# Altium PCB Portable iron V3.0 copy_2020-11-07_00-05-57.pcbdoc
Units mm, origin at the board's own origin, x right, y up, seen from the top; angles counter-clockwise.
Board outline 158.21 x 82.37 mm, 2 copper layers (Top Layer, Bottom Layer); 40 components, 54 nets, 120 pads, 41 vias.
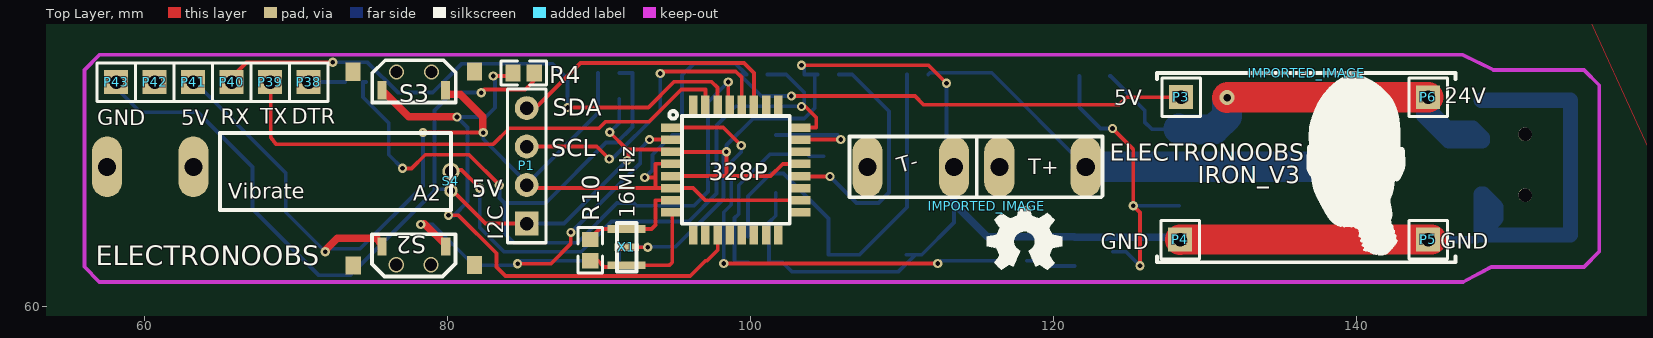
[diagram p0: Top Layer view]
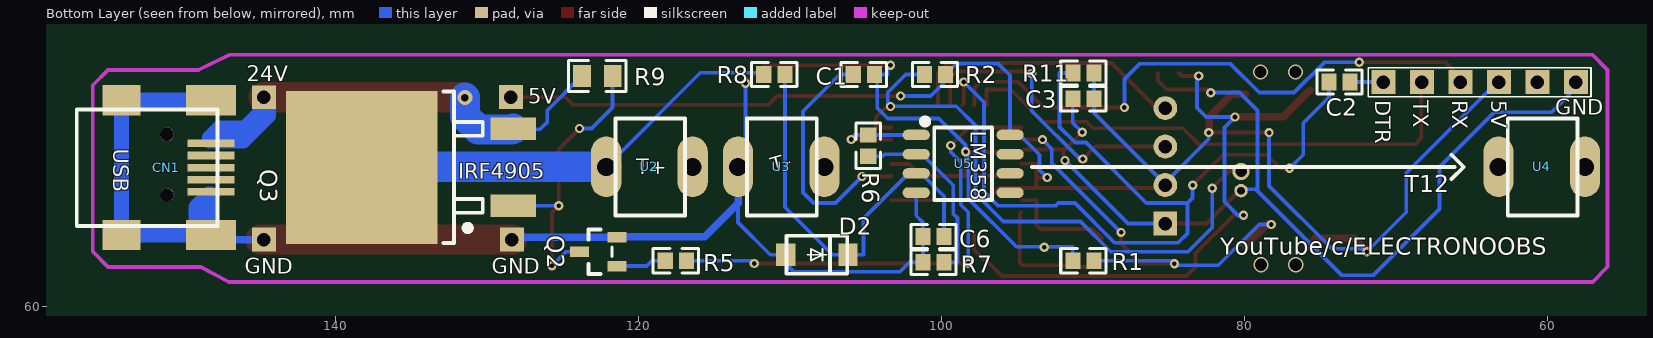
[diagram p1: Bottom Layer view, seen from below]

## Layer stack, top to bottom
Top Layer: signal copper (thickness not stored)
Dielectric: dielectric 0.32, FR-4, Dk 4.8
Bottom Layer: signal copper (thickness not stored)

## Board outline
183.61,25.4 25.4,25.4 25.4,107.77 183.61,107.77

## Components (designator, comment, footprint, x,y, rotation, side; value= is the part's Value field where it differs from the comment)
328P "ATMEGA328P-AU" ?#1 99.042,68.998 r0 top
C1 "5.6nF" ?#2 104.342,75.298 r180 bottom
C2 "5.6nF" ?#3 72.94,74.8 r180 bottom
C3 "5.6nF" ?#4 89.842,73.698 r180 bottom
C6 "CAP-0603" ?#5 101.34,64.6 r0 bottom
CN1 "USB - Mini USB" ?#6 154.142,73.598 r90 bottom
D2 "SS12" ?#7 108.14,63.4 r0 bottom
IMPORTED_IMAGE "IMPORTED_IMAGE" IMPORTED_IMAGE 115.6,66.612 r0 top
IMPORTED_IMAGE "IMPORTED_IMAGE" IMPORTED_IMAGE 136.726,75.371 r0 top
P1 "i2c_OLED" ?#8 85.24,68 r90 top
P3 "Header 1*1P" ?#9 128.44,73.8 r0 top
P4 "Header 1*1P" ?#9 128.366,64.394 r0 top
P5 "Header 1*1P" ?#9 144.74,64.4 r0 top
P6 "Header 1*1P" ?#9 144.74,73.798 r0 top
P38 "DTR" ?#10 70.84,74.8 r0 top
P39 "TX" ?#10 68.3,74.8 r0 top
P40 "RX" ?#10 65.76,74.8 r0 top
P41 "VCC_uart" ?#10 63.22,74.8 r0 top
P42 "NC" ?#10 60.68,74.8 r0 top
P43 "GND_uart" ?#10 58.14,74.8 r0 top
Q2 "2SC3356-T1B-A" ?#11 123.94,63.6 r270 bottom
Q3 "IRF4905STRLPBF" TO-263-2 128.162,66.758 r270 bottom
R1 "24Ω(240)" ?#12 91.442,62.998 r0 bottom
R2 "24Ω(240)" ?#13 101.242,75.298 r0 bottom
R4 "24Ω(240)" ?#14 85.84,75.4 r180 top
R5 "200K" ?#2 116.742,62.998 r180 bottom
R6 "200K" ?#4 104.842,69.798 r270 bottom
R7 "1k" ?#2 101.34,62.9 r0 bottom
R8 "10k" ?#4 110.242,75.298 r180 bottom
R9 "10k" 0805 123.741,75.2 r0 bottom
R10 "24Ω(240)" ?#14 89.44,62.9 r90 top
R11 "24Ω(240)" ?#3 91.442,75.398 r0 bottom
S2 "90 deg button with wings" "90 DEG PUSH BUTTON WITH WINGS"#1 74.642,65.098 r0 top
S3 "90 deg button with wings" "90 DEG PUSH BUTTON WITH WINGS"#2 80.94,73.1 r180 top
S4 "vibrate sensor" "VIBRATE SENSOR" 80.24,68.9 r90 top
U2 "Fuse clip 1p TH" ?#15 122.14,69.2 r0 bottom
U3 "Fuse clip 1p TH" ?#15 113.441,69.201 r0 bottom
U4 "Fuse clip 1p TH" ?#15 63.24,69.2 r0 bottom
U5 "LM358G-S08-R" ?#16 96.042,67.498 r0 bottom
X1 "16MHz" ?#17 91.84,63.9 r270 top

## Footprints (in the part's own frame and the unit in brackets; to place one, negate y for a bottom-side part, rotate by r counter-clockwise, add the part's x,y. Pads: shape width x height; smd on the part's side, far side on the other; paste and mask are expansions set on the pad)
"90 DEG PUSH BUTTON WITH WINGS"#1 [mm]
  rect 0.599x1.199 smd: 1(1.05,-1.16) 2(5.251,-1.16)
  rect 1.001x1.201 smd: 3(-0.847,-2.401)
  rect 0.998x1.201 smd: 3(7.16,-2.383)
  silkscreen extent 0.38,-3.14 5.9,-0.35
"90 DEG PUSH BUTTON WITH WINGS"#2 [mm]
  rect 0.599x1.199 smd: 1(1.049,-1.161) 2(5.251,-1.161)
  rect 1.001x1.201 smd: 3(-0.848,-2.401)
  rect 1.001x1.199 smd: 3(7.161,-2.382)
  silkscreen extent 0.38,-3.14 5.9,-0.35
0805 [mm]
  rect 1.16x1.47 smd: 1(0,0) 2(-2.032,0)
  silkscreen extent -2.89,-1.04 0.88,1.04
IMPORTED_IMAGE [mm]
  silkscreen extent 0,-4.2 5,0
TO-263-2 [mm]
  rect 1.5x3 smd: 1(0.127,-0.127) 3(-4.953,-0.127)
  rect 10.1x10 smd: 4(-2.413,-10.127)
  silkscreen extent -7.41,-4.73 2.59,-2.13
"VIBRATE SENSOR" [mil]
  round 45 hole 30: 1(0,0)
  round 35 hole 20: 2(-50,0)
  silkscreen extent -100,0 100,600
?#1 [mil]
  rect 50x22 smd: 1(-168.99,109.97) 2(-168.99,78.97) 3(-168.99,46.97) 4(-168.99,15.97) 5(-168.99,-16.03) 6(-168.99,-47.03) 7(-168.99,-79.03) 8(-168.99,-110.03) 17(169.01,-110.03) 18(169.01,-79.03) 19(169.01,-47.03) 20(169.01,-16.03) 21(169.01,15.97) 22(169.01,46.97) 23(169.01,78.97) 24(169.01,109.97)
  rect 22x50 smd: 9(-109.99,-169.03) 10(-78.99,-169.03) 11(-46.99,-169.03) 12(-15.99,-169.03) 13(16.01,-169.03) 14(47.01,-169.03) 15(79.01,-169.03) 16(110.01,-169.03) 25(110.01,168.97) 26(79.01,168.97) 27(47.01,168.97) 28(16.01,168.97) 29(-15.99,168.97) 30(-46.99,168.97) 31(-78.99,168.97) 32(-109.99,168.97)
  silkscreen extent -173,-140 140,153
?#2 [mil]
  rect 39.4x43.3 smd: 1(-3.95,-0.01) 2(-59.05,-0.01)
  silkscreen extent -91,-32 28,31
?#3 [mil]
  rect 39.3x43.3 smd: 1(-3.9,0.02)
  rect 39.4x43.3 smd: 2(-59.05,0.02)
  silkscreen extent -91,-32 28,31
?#4 [mil]
  rect 39.4x43.3 smd: 1(-3.91,-0.02)
  rect 39.3x43.3 smd: 2(-59.06,-0.02)
  silkscreen extent -91,-31 28,32
?#5 [mil]
  rect 39.4x43.3 smd: 1(-3.96,-0.09)
  rect 39.3x43.3 smd: 2(-59.11,-0.09)
  silkscreen extent -91,-32 28,31
?#6 [mil]
  rect 19.7x122 smd: 1(-112.18,-232.28) 2(-143.68,-232.28) 3(-175.18,-232.28) 4(-206.68,-232.28) 5(-238.18,-232.28)
  rect 78.7x98.4 smd: 6(0.02,0.02) 7(-350.38,0.02)
  rect 78.7x130 smd: 8(0.02,-232.28) 9(-350.38,-232.28)
  round 35.43 hole 35.43 unplated: ""(-246.5,-118.1) ""(-88.6,-118.1)
  silkscreen extent -327,-250 -24,116
?#7 [mil]
  rect 50x57.9 smd: 1(85.02,-0.03) 2(-76.98,-0.03)
  silkscreen extent -75,-49 82,49
?#8 [mil]
  rect 62x62 hole 35: 1(-100.02,0)
  round 62 hole 35: 2(0,0) 3(100,0) 4(200,0)
  silkscreen extent -150,-50 250,50
?#9 [mil]
  rect 62x62 hole 35: 1(0.01,0.04)
  silkscreen extent -50,-50 50,50
?#10 [mil]
  rect 62x62 hole 35: 1(0.02,-0.03)
  silkscreen extent -50,-50 50,50
?#11 [mil]
  rect 27.6x49.2 smd: 1(-37.41,99.22) 2(37.39,99.22) 3(-0.01,0.82)
  silkscreen extent -58,24 57,85
?#12 [mil]
  rect 39.3x43.3 smd: 1(-3.93,-0.04)
  rect 39.4x43.3 smd: 2(-59.08,-0.04)
  silkscreen extent -91,-31 28,32
?#13 [mil]
  rect 39.3x43.3 smd: 1(-3.95,0.01)
  rect 39.4x43.3 smd: 2(-59.1,0.01)
  silkscreen extent -91,-32 27,31
?#14 [mil]
  rect 39.4x43.3 smd: 1(3.93,0.01) 2(59.03,0.01)
  silkscreen extent -28,-32 91,31
?#15 [mil]
  oval 78.74x157.48 hole 47.24: 1(0,0) 2(-224.4,0)
  silkscreen extent -205,-126 -24,126
?#16 [mil]
  oval 70.87x27.56 smd: 1(222,-150) 2(222,-100) 3(222,-50) 4(222,0) 5(-22,0) 6(-22,-50) 7(-22,-100) 8(-22,-150)
  silkscreen extent 25,-193 207,19
?#17 [mil]
  rect 19.6x98.5 smd: 1(-47.2,0) 3(47.2,0)
  rect 19.6x63 smd: 2(0,-0.05)
  silkscreen extent -63,-26 63,26

## Via types
v1: diameter 0.61, hole 0.31, Top Layer to Bottom Layer, 30 vias
v2: diameter 0.62, hole 0.305, Top Layer to Bottom Layer, 6 vias
v3: diameter 1, hole 0.8, Top Layer to Bottom Layer, 4 vias
v4: diameter 1, hole 0.5, Top Layer to Bottom Layer, 1 vias

## Nets (pads, with @x,y where several pads share a name; then routed paths per layer and width w, separated by ;. In a path a pad name is that pad's centre, name@x,y a point inside that pad or via, vN(x,y) a via of type N, cw(c..) or ccw(c..) an arc to the next point about the centre after c; other vN are vias at no path point)
328P_7: 328P.7 R10.2 X1.1 | length 7.4
  Top Layer w0.25: R10.2@89.441,64.4 89.441,64.499 90.04,65.099 X1.1 91.841,65.099 93.472,65.099 93.734,65.36 93.734,66.991 328P.7
328P_8: 328P.8 R10.1 X1.3 | length 9.4
  Top Layer w0.25: R10.1@89.791,63.001 89.441,63.001 89.939,63.001 90.34,62.599 91.74,62.599 91.841,62.701 94.64,62.701 94.841,62.899 94.841,66.115 328P.8
328P_10: 328P.10
328P_12: 328P.12
328P_13: 328P.13
328P_14: 328P.14
328P_15: 328P.15
328P_16: 328P.16
328P_17: 328P.17
328P_19: 328P.19
328P_20: 328P.20 C1.2 | length 16.5
  Top Layer w0.25: 328P.20 103.335,68.558 v1@105.263,68.558
  Bottom Layer w0.25: v1@105.263,68.558 107.003,66.818 108.458,66.818 109.151,67.509 109.151,72.871 106.723,75.299 C1.2
  other v1: 105.262,68.559
328P_22: 328P.22
328P_25: 328P.25
328P_26: 328P.26
328P_32: 328P.32
+5V: 328P.4 328P.6 328P.18 C3.1 P1.2 P3.1 P41.1 R2.2 R11.2 S2.1 S3.1 U5.8 | length 118.7
  Top Layer w0.25: v1(78.387,71.462) 81.374,71.462 v1(82.37,71.462) ; P1.2@85.24,67.999 85.435,67.804 93.734,67.804 ; v2(93.04,68.5) 93.734,68.5 ; 328P.4 93.734,69.404 93.734,67.804 ; v1(102.71,73.875) 110.866,73.875 111.44,73.3 124.341,73.3 124.841,73.801 P3.1 ; 328P.18 97.038,66.991 96.225,67.804 328P.6 93.734,67.804
  Top Layer w0.5: v1(71.94,63.6) 71.94,63.702 72.738,64.499 75.344,64.499 S2.1 ; S3.1@79.939,73.999 80.841,73.999 82.339,72.5 82.339,71.492 v1(82.37,71.462)
  Bottom Layer w0.25: P41.1 63.221,74.921 69.339,68.8 69.339,66.201 v1(71.94,63.6) 72.141,63.801 74.239,63.801 78.387,67.946 v1(78.387,71.462) ; v1(82.37,71.462) 82.37,71.04 84.968,68.441 P1.2@85.24,68.441 ; P1.2@85.24,67.999 P1.2@85.24,68.441 ; R11.2@89.941,75.396 89.941,73.697 89.941,72.767 85.618,68.441 P1.2@85.24,68.441 ; v2(93.04,68.5) 93.541,69 93.541,70.001 94.849,71.309 U5.8 95.484,75.244 96.241,76 99.04,76 99.741,75.297 99.301,75.297 100.724,73.875 v1(102.71,73.875)
BUZZ: 328P.9
CN1_2: CN1.2
CN1_3: CN1.3
CN1_4: CN1.4
DTR: C2.1 P38.1 | length 2.4
  Bottom Layer w0.25: P38.1 72.009,74.799 72.011,74.799 C2.1@73.241,74.799
GND: 328P.3 328P.5 328P.21 C1.1 C3.2 C6.1 CN1.5 CN1.6 CN1.7 CN1.8 CN1.9 D2.1 P1.1 P4.1 P5.1 P43.1 Q2.1 R1.1 R4.1 R7.1 S4.2 U3.1 U5.4 X1.2 | length 210.8
  Top Layer w0.25: S4.2@80.241,67.73 82.509,65.459 P1.1 ; v1(82.24,74.1) 82.441,74.299 85.141,74.299 85.74,74.898 R4.1@85.74,75.399 ; v1(90.726,71.487) 91.869,70.344 91.953,70.344 ; X1.2 v1(93.226,63.9) ; v1(91.855,69.619) 91.953,69.62 91.953,70.344 ; 328P.5 101.333,68.591 102.141,69.399 103.33,69.399 328P.21 ; 98.433,68.591 98.42,68.604 v1(98.42,70.192) 95.766,70.192 95.258,70.192 328P.3 94.597,70.344 91.953,70.344 ; v1(103.378,75.907) 111.762,75.907 v1(112.949,74.72)
  Top Layer w2: P4.1 128.374,64.403 P5.1@144.95,64.403
  Bottom Layer w0.25: P43.1 57.894,74.649 59.738,72.8 63.541,72.8 67.14,69.201 67.14,66.425 71.524,62.041 73.581,62.041 79.212,67.672 79.154,67.73 ; S4.2@80.241,67.73 79.154,67.73 ; v1(82.24,74.1) 80.34,74.101 79.154,72.914 79.154,67.73 ; P1.1 87.696,65.459 v1(91.855,69.619) ; v1(90.726,71.487) 91.343,72.104 C3.2@91.343,73.697 ; R1.1@91.343,62.998 91.343,63.339 91.343,63.93 v1@93.226,63.93 ; v1(93.226,63.9) v1@93.226,63.93 ; U5.4 101.681,65.973 101.242,65.533 101.242,64.601 101.242,64.263 101.242,63.669 101.239,63.669 101.239,62.899 102.123,62.899 102.738,62.284 109.776,62.284 D2.1@110.894,63.4 ; v1(103.378,75.907) 103.561,75.726 103.561,75.299 C1.1@104.254,75.299 ; C1.1 C1.1@104.254,75.299 ; D2.1@110.299,63.4 D2.1@110.894,63.4 ; v1(112.949,74.72) 112.949,69.694 U3.1 113.441,65.526 111.315,63.4 D2.1@110.894,63.4 ; CN1.9@148.242,64.697 CN1.9@149.08,64.697 ; v1@93.226,63.93 95.07,63.93 98.224,67.085 98.224,69.993 v1(98.42,70.192) 98.42,70.633 100.188,72.399 103.563,72.399 104.254,73.09 C1.1@104.254,75.299
  Bottom Layer w0.5: U3.1 113.441,66.798 115.641,64.601 121.371,64.601 Q2.1 128.209,64.55 P4.1 ; P5.1@144.95,64.403 147.945,64.403 CN1.9@148.242,64.697
  Bottom Layer w1: CN1.9 148.242,64.812 149.23,65.8 149.23,66.562 CN1.5@148.394,67.398 ; CN1.5@148.242,67.396 CN1.9 CN1.7 ; CN1.8@148.242,73.598 154.142,73.598 CN1.7@154.142,64.697
HALL: 328P.24 R2.1 S4.1 | length 40.4
  Top Layer w0.25: S4.1@80.241,69 80.94,69 v2(82.141,67.799) ; 328P.24 104.351,71.792 104.351,72.462 103.624,73.189 v1(103.383,73.189)
  Bottom Layer w0.25: v2(82.141,67.799) 82.141,65.198 83.739,63.6 88.839,63.6 90.841,65.599 95.941,65.599 97.772,67.433 97.772,71.931 99.04,73.199 v1(103.383,73.189) 103.37,73.199 103.561,73.387 103.561,74.113 102.375,75.297 R2.1@101.143,75.297
L_BUT: 328P.2 R1.2 S2.2 | length 29.8
  Top Layer w0.25: v1(84.64,62.8) 86.84,62.8 88.14,64.101 88.14,64.86 v1(88.156,64.875) ; v1@93.347,70.999 93.353,71.004 328P.2
  Top Layer w0.5: v2(78.24,65.4) 78.486,65.454 79.946,63.994 S2.2
  Bottom Layer w0.25: v2(78.24,65.4) 79.04,65.401 81.74,62.701 84.539,62.701 v1(84.64,62.8) 84.838,62.998 R1.2@89.941,62.998 ; v1(88.156,64.875) 92.74,69.457 92.74,70.392 v1@93.347,70.999
  other v1: 93.347,70.999
P42_1: P42.1
PWM_MOS: 328P.1 R5.1 | length 32.1
  Top Layer w0.25: 328P.1 95.766,71.792 98.217,71.792 v1(99.4,70.606) ; v1(98.247,62.818) v1(112.37,62.818)
  Bottom Layer w0.25: v1(98.247,62.818) 98.247,66.206 98.74,66.699 98.74,69.518 99.4,70.179 v1(99.4,70.606) ; v1(112.37,62.818) 112.55,62.998 R5.1
Q2_2: Q2.2 R5.2 | length 3.3
  Bottom Layer w0.25: R5.2 119.123,62.998 119.471,62.65 Q2.2
Q2_3: Q2.3 Q3.1 R9.2 | length 19.9
  Top Layer w0.25: v1(123.909,71.731) 125.27,70.37 v1(125.27,66.641) ; v1(125.27,66.641) 125.72,66.19 v1(125.72,62.671)
  Bottom Layer w0.25: R9.2 121.72,75.189 121.72,73.13 123.12,71.73 v1(123.909,71.731) ; Q2.3 124.79,63.6 v1(125.72,62.671) ; v1(125.27,66.641) 128.28,66.64 Q3.1
R_BUT: 328P.11 R4.2 S3.2 | length 41.2
  Top Layer w0.25: v1@80.079,65.998 80.739,66.001 83.241,63.501 83.241,62.599 83.84,62 96.04,62 97.041,63.001 97.14,63.001 97.848,63.709 328P.11 ; v2(83.04,75.2) 84.14,75.2 R4.2@84.341,75.399
  Top Layer w0.5: S3.2 77.351,72.599 77.452,72.498 v1@80.642,72.498
  Bottom Layer w0.25: v1@80.079,65.998 80.439,65.998 81.341,66.9 81.341,71.799 80.642,72.498 v1(80.642,72.498) 82.54,72.5 83.139,73.1 83.139,75.2 v2(83.04,75.2)
  other v1: 80.078,65.999
RESET: 328P.29 C2.2 R11.1 | length 57.4
  Top Layer w0.25: v2(77.041,69.099) 77.64,69.099 78.539,70.001 81.44,70.001 v2(83.439,67.999) ; v1(98.542,74.798) 98.542,73.384 328P.29
  Bottom Layer w0.25: C2.2@74.64,74.799 74.44,74.799 74.44,73.801 76.139,72.099 76.139,70.001 v2(77.041,69.099) ; v2(83.439,67.999) 83.439,67.149 83.774,66.813 ; R11.1@91.343,75.396 92.222,75.396 92.222,71.837 91.186,70.801 90.48,70.801 86.492,66.813 83.774,66.813 ; v1(98.542,74.798) 97.208,73.466 97.208,67.568 96.268,66.628 92.484,66.628 92.304,66.808 91.209,66.808 88.59,64.187 84.397,64.187 83.774,64.809 83.774,66.813
RX: 328P.30 P40.1 | length 38.7
  Top Layer w0.25: P40.1 65.74,74.799 65.74,75.099 66.741,76.1 v1@72.441,76.1 ; v1(87.94,73.125) 93.269,73.125 94.96,74.817 97.445,74.817 97.826,74.433 97.826,73.313 328P.30
  Bottom Layer w0.25: v1@72.441,76.1 74.739,76.1 76.741,74.101 79.04,74.101 80.94,76 86.939,76 87.94,75 v1(87.94,73.125)
  other v1: 72.44,76.1
S$38: 
S$41: 
S$67: 
S$69: 
S$1165: 
S$2629: 
S$2631: 
S$2634: 
S$2637: 
S$5247: 
S$5251: 
SCL: 328P.28 P1.3 | length 20.4
  Top Layer w0.25: P1.3@85.24,70.539 89.86,70.539 v1(90.686,69.714) ; v1(94.056,75.36) 94.056,75.5 99.04,75.5 99.441,75.099 328P.28@99.441,73.29
  Bottom Layer w0.25: v1(90.686,69.714) 90.874,69.714 94.056,72.897 v1(94.056,75.36)
SDA: 328P.27 P1.4 | length 18.8
  Top Layer w0.25: P1.4@85.24,73.079 85.529,72.79 88.788,76.049 99.591,76.049 100.236,75.404 328P.27
TEMP: 328P.23 R6.2 U5.1 | length 7.1
  Top Layer w0.25: 328P.23 v1(105.976,71.004)
  Bottom Layer w0.25: U5.1 103.899,71.309 103.909,71.299 104.503,71.299 R6.2 105.773,71.299 105.773,71.208 v1(105.976,71.004)
TEMP_SENSE: Q3.4 R8.2 U2.1 | length 29.2
  Bottom Layer w0.25: R8.2@111.742,75.299 111.851,75.409 115.933,75.409 U2.1@122.141,69.198
  Bottom Layer w2: U2.1 138.26,69.201 Q3.4@138.288,69.17
TX: 328P.31 P39.1 | length 35.1
  Top Layer w0.25: P39.1 68.341,74.799 68.341,71.157 68.694,70.7 83.038,70.7 84.089,71.749 90.015,71.749 90.442,72.175 93.307,72.175 95.44,74.306 97.036,74.306 328P.31
U4_1: U4.1
U5_5: U5.5
U5_6: U5.6
U5_7: U5.7
V+: C6.2 D2.2 R8.1 U5.3 | length 27.5
  Bottom Layer w0.25: C6.2@99.84,64.601 99.84,65.533 99.84,67.258 101.351,68.769 U5.3 102.184,68.769 105.169,65.785 105.169,63.4 106.185,63.4 107.201,63.4 110.34,66.539 110.34,74.367 R8.1
V-: R6.1 R7.2 U5.2 | length 12.6
  Bottom Layer w0.25: R7.2@99.84,62.899 98.958,62.899 98.958,65.818 99.238,66.097 99.238,67.982 101.295,70.039 U5.2 103.769,70.039 103.909,69.897 R6.1
VCC: CN1.1 P6.1 Q3.3 R9.1 | length 35.9
  Top Layer w2: v4(131.47,73.77) 131.499,73.799 P6.1@144.74,73.799
  Bottom Layer w0.25: R9.1 123.77,75.2 126.03,72.94 126.03,72.16 126.5,71.69 128.267,71.69 Q3.3
  Bottom Layer w1: 144.45,72.551 146.098,70.903 148.311,70.903 148.311,71.149 147.709,71.751 146.019,71.751 144.739,73.029 P6.1 144.45,73.737 144.45,72.551
  Bottom Layer w2: Q3.3@128.288,71.71 128.377,71.67 130.599,71.67 131.47,72.541 v4(131.47,73.77)
pads on no net: CN1. S2.3 S3.3 U2.2 U3.2 U4.2
copper on no net:
  other v3: 76.632,62.738 78.933,62.738 76.649,75.46 78.95,75.46

## Polygon pours and split planes (outlines as drawn)
GND on Bottom Layer (solid): 160.56,85.09 170.91,58.78 170.18,45.72 114.12,38.1 54.25,48.26 46.99,79.83 57.88,90.89
GND on Top Layer (solid): 154.76,80.37 163.65,60.78 161.47,50.62 149.13,46.26 63.5,49.35 38.1,58.42 42.09,84 48.8,95.07

## Silkscreen, mask and mechanical layers (free items; w line width, h text height)
Top Overlay:
  lines w0.25 net S$2629: 126.84,75 126.84,75.401 146.54,75.401 146.54,75
  lines w0.25 net S$2631: 126.84,63.3 126.84,62.899 146.54,62.899 146.54,63.3
  lines w0.25 net S$2634: 106.54,67.199 106.54,71.2 123.241,71.2 123.241,67.301 123.139,67.199 106.54,67.199
  lines w0.25 net S$2637: 114.94,67.199 114.94,71.2
  text "24V" at 145.838,73.4 h1
  text "5V" at 124.039,73.255 h1
  text "SDA" at 86.951,72.585 h1.14
  text "TX" at 67.64,72.054 h1
  text "DTR" at 69.74,72.055 h1
  text "RX" at 65.04,72 h1
  text "GND" at 56.88,71.95 h1
  text "5V" at 62.44,71.954 h1
  text "SCL" at 86.851,69.915 h1.14
  text "ELECTRONOOBS" at 123.74,69.605 h1.14
  text "T-" at 109.858,68.789 h1 r16
  text "T+" at 118.34,68.7 h1
  text "IRON_V3" at 129.54,68.105 h1.14
  text "5V" at 81.62,67.214 h1.14
  text "Vibrate" at 65.541,67.109 h1
  text "A2" at 77.74,66.954 h1
  text "16MHz" at 92.386,65.817 h1 r90
  text "I2C" at 83.686,64.382 h1 r90
  text "GND" at 145.537,63.802 h1
  text "GND" at 123.14,63.755 h1
  text "ELECTRONOOBS" at 56.791,62.721 h1.3
Bottom Overlay:
  lines w0.102 net S$1165: 57.14,73.839 57.14,75.739 71.839,75.739 71.839,73.839 57.14,73.839
  lines w0.25 net S$5247: 66.34,68.401 65.54,69.201 66.34,70.001
  lines w0.25 net S$5251: 66.139,69.201 94.041,69.201
  text "24V" at 145.885,74.854 h1
  text "5V" at 63.74,73.6 h1 r90
  text "RX" at 66.285,73.6 h1 r90
  text "TX" at 68.885,73.6 h1 r90
  text "DTR" at 71.386,73.6 h1 r90
  text "5V" at 127.304,73.354 h1
  text "GND" at 59.494,72.655 h1
  text "LM358" at 98.07,71.57 h1 r90
  text "USB" at 154.685,70.4 h1 r90
  text "T-" at 111.117,68.794 h1 r344
  text "T+" at 120.17,68.71 h1
  text "IRF4905" at 131.902,68.404 h1
  text "T12" at 69.442,67.527 h1.14
  text "YouTube/c/ELECTRONOOBS" at 81.603,63.387 h1.14
  text "GND" at 129.694,62.154 h1
  text "GND" at 145.995,62.155 h1
Document:
  lines w0.003: 104.479,66.56 104.53,66.61